# Altium PCB ММС схема D650 T9M.pcbdoc (part 2 of 2)
Units mm, origin at the board's own origin, x right, y up, seen from the top; angles counter-clockwise.
Board outline 130 x 14 mm, 2 copper layers (Top Layer, Bottom Layer), stack 1.57 mm thick; 158 components, 79 nets, 412 pads, 74 vias.
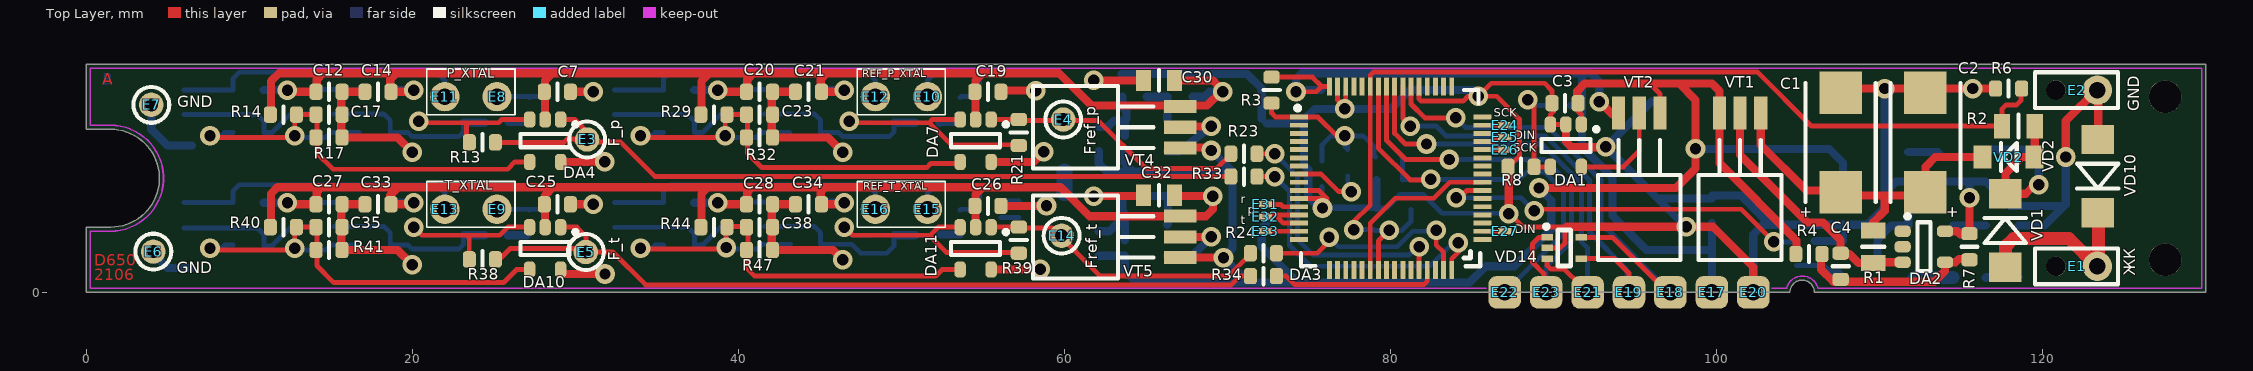
[diagram p0: Top Layer view]

## Silkscreen, mask and mechanical layers (free items; w line width, h text height)
Top Overlay:
  lines w0.1: 20.9,4 20.9,6.8 22.325,6.8 24.975,6.8 26.3,6.8 26.3,4 20.9,4 ; 20.9,10.9 20.9,13.7 22.325,13.7 24.975,13.7 26.3,13.7 26.3,10.9 20.9,10.9 ; 47.3,4 47.3,6.8 48.725,6.8 51.375,6.8 52.7,6.8 52.7,4 47.3,4 ; 47.3,10.9 52.7,10.9 52.7,13.7 51.375,13.7 48.725,13.7 47.3,13.7 47.3,10.9
  lines w0.25: 74.5,2.4 74.5,1.6 75.4,1.6 ; 84.5,12.4 85.4,12.4 85.4,11.6 ; 84.6,1.6 85.5,1.6 85.5,2.4 ; 97.79,1.983 97.79,3.3 ; 97.79,4.8 97.79,7.19 ; 103.97,1.983 103.97,2.47 ; 103.97,3.7 103.97,7.19
Bottom Overlay:
  lines w0.1: 125.5,6.25 125.5,6.25
Mechanical 1:
  circle w0.254: c127.5,2 r1.6
  circle w0.254: c127.5,12 r1.6
  lines w0.1: 23,7 72,7 ; 125.5,-2.6 125.5,16.2 ; 125.5,14 130.5,14
  lines w0.254: 115.5,9.75 117,9.75
Mechanical 2:
  lines w0.254: 96.475,11.2 97.625,11.2 ; 113.75,1.75 115.25,1.75 ; 115.75,3.25 117.25,3.25
Mechanical 3:
  lines w0.2: 0,0 2,0 104.49,0 cw(c105.24,0) 105.99,0 130,0 130,14 0,14 0,10 1.5,10 cw(c1.5,7) 1.5,4 0,4 0,0
Mechanical 15:
  lines w0.254: 62,-1 62,15 ; 123.5,-1 123.5,15

## Text inside footprints (layer, text, board x,y; h text height)
C1: Mechanical 1 "+" at 108.05,7.25 h1.2 r90; Top Overlay "+" at 106,4.5 h1.2 r90
C2: Mechanical 1 "+" at 113.25,7.25 h1.2 r90; Top Overlay "+" at 115,4.5 h1.2 r90
C6: Mechanical 2 "+" at 107.3,7.3 h1.2 r270; Bottom Overlay "+" at 105.5,4.9 h1.2 r270
C8: Mechanical 2 "+" at 71.65,5.65 h1.2 r270; Bottom Overlay "+" at 73.6,3.2 h1.2 r270
DA1: Mechanical 1 "1" at 91.4,9.6 h1 r270; Mechanical 1 "5" at 91.4,8.7 h1 r270
DA2: Mechanical 1 "1" at 112.1,3.45 h1; Mechanical 1 "5" at 113,3.45 h1
DA3: Mechanical 1 "1" at 75.265,10.538 h1.2; Mechanical 1 "64" at 75.9,11.3 h1.2
DA4: Mechanical 1 "1" at 28.8,9.9 h1 r270; Mechanical 1 "5" at 28.8,9 h1 r270
DA5: Mechanical 2 "1" at 10.6,10.5 h1 r270; Mechanical 2 "5" at 10.6,11.4 h1 r270
DA6: Mechanical 2 "1" at 18.35,10.5 h1 r270; Mechanical 2 "5" at 18.35,11.4 h1 r270
DA7: Mechanical 1 "1" at 55.2,9.9 h1 r270; Mechanical 1 "5" at 55.2,9 h1 r270
DA8: Mechanical 2 "1" at 37,10.5 h1 r270; Mechanical 2 "5" at 37,11.4 h1 r270
DA9: Mechanical 2 "1" at 44.75,10.5 h1 r270; Mechanical 2 "5" at 44.75,11.4 h1 r270
DA10: Mechanical 1 "1" at 28.8,3.3 h1 r270; Mechanical 1 "5" at 28.8,2.4 h1 r270
DA11: Mechanical 1 "1" at 55.2,3.3 h1 r270; Mechanical 1 "5" at 55.2,2.4 h1 r270
DA12: Mechanical 2 "1" at 64.4,8.95 h1 r180; Mechanical 2 "5" at 65.3,8.95 h1 r180
DA13: Mechanical 2 "1" at 64.4,2.55 h1 r180; Mechanical 2 "5" at 65.3,2.55 h1 r180
DA14: Mechanical 2 "1" at 10.6,3.6 h1 r270; Mechanical 2 "5" at 10.6,4.5 h1 r270
DA15: Mechanical 2 "1" at 37,3.6 h1 r270; Mechanical 2 "5" at 37,4.5 h1 r270
DA16: Mechanical 2 "1" at 18.35,3.6 h1 r270; Mechanical 2 "5" at 18.35,4.5 h1 r270
DA17: Mechanical 2 "1" at 44.75,3.6 h1 r270; Mechanical 2 "5" at 44.75,4.5 h1 r270
VD14: Mechanical 1 "5" at 91.65,4.425 h1.2 r270
VT1: Mechanical 1 "3" at 102.469,5.814 h1.2; Mechanical 1 "2" at 101.049,5.793 h1.2; Mechanical 1 "1" at 99.802,5.814 h1.2
VT2: Mechanical 1 "3" at 96.289,5.814 h1.2; Mechanical 1 "2" at 94.869,5.793 h1.2; Mechanical 1 "1" at 93.622,5.814 h1.2
VT4: Mechanical 1 "3" at 61.914,9.086 h1.2 r270; Mechanical 1 "2" at 61.893,10.506 h1.2 r270; Mechanical 1 "1" at 61.914,11.753 h1.2 r270
VT5: Mechanical 1 "3" at 61.914,2.361 h1.2 r270; Mechanical 1 "2" at 61.893,3.781 h1.2 r270; Mechanical 1 "1" at 61.914,5.028 h1.2 r270